# Altium PCB w47_LED_RGB_pinout.PcbDoc (part 1 of 2)
Units mm, origin at the board's own origin, x right, y up, seen from the top; angles counter-clockwise.
Board outline 167.64 x 288.93 mm, 2 copper layers (Top Layer, Bottom Layer); 100 components, 123 nets, 258 pads, 0 vias.
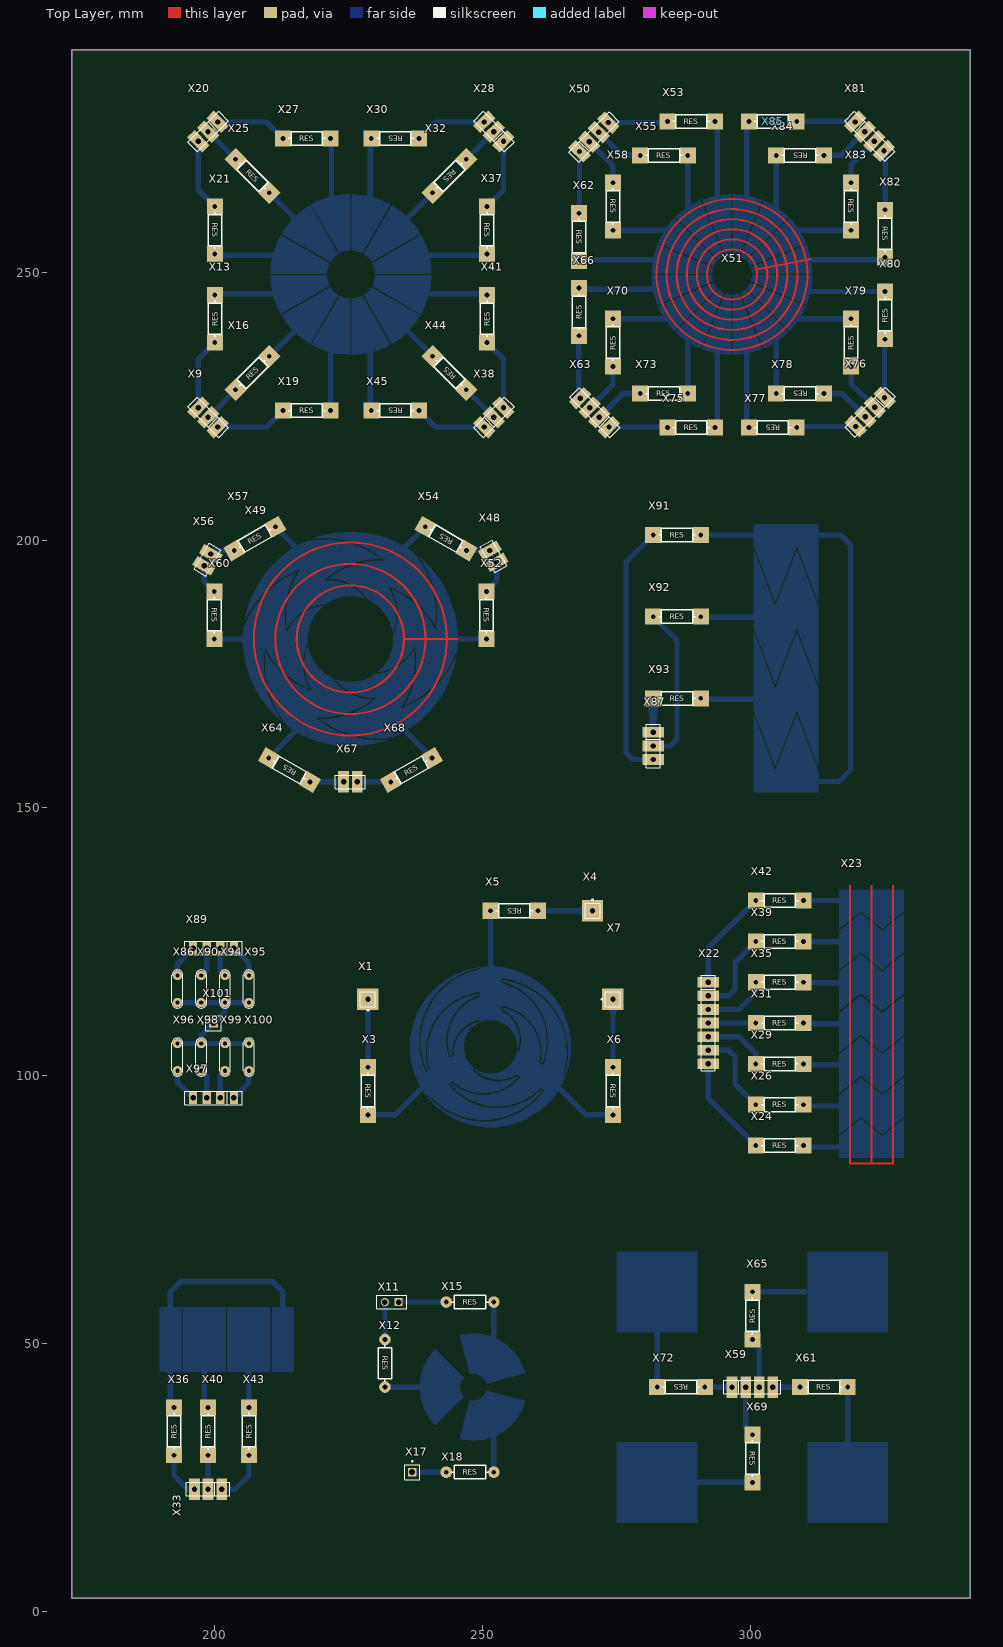
[diagram p0: Top Layer view]
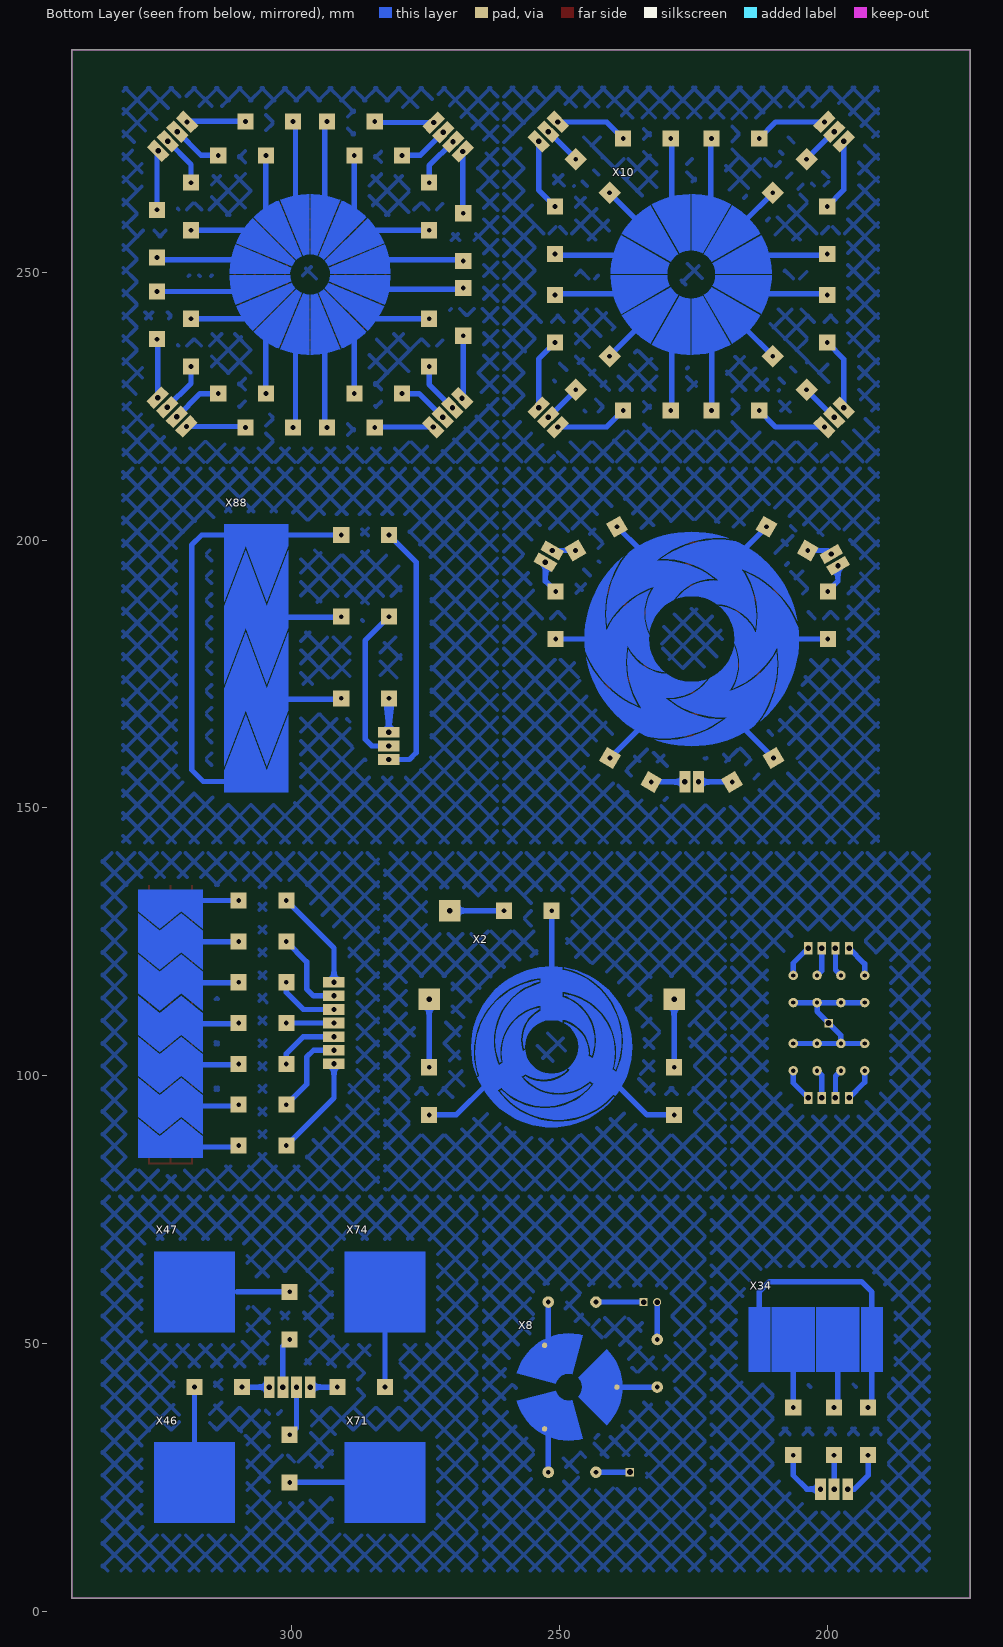
[diagram p1: Bottom Layer view, seen from below]

## Layer stack, top to bottom
Top Solder: solder mask 0.0102, Solder Resist, Dk 3.5
Top Layer: signal copper 0.0356
Dielectric 1: dielectric 0.32, FR-4, Dk 4.8
Bottom Layer: signal copper 0.0356
Bottom Solder: solder mask 0.0102, Solder Resist, Dk 3.5

## Board outline
173.355,2.54 173.355,146.05 173.355,291.465 340.995,291.465 340.995,146.05 340.995,2.54

## Design rules (kind name [scope] priority, off if disabled: settings)
Clearance [All] p1: gap=2 ignorepadtopadclearanceinfootprint=FALSE
PolygonConnect [All] p1: connectstyle=Relief reliefconductorwidth=0.254 reliefentries=4 polygonreliefangle="90 Angle" airgapwidth=0.254
RoutingVias [All] p1: holewidth=0.711 width=1.27 viastyle="Through Hole" minholewidth=0.711 minwidth=1.27 maxholewidth=0.711 maxwidth=1.27
SolderMaskExpansion [All] p1: expansion=0.102
Width [All] p1: maxlimit=2 minlimit=0.914 preferedwidth=1.5 toplayer_maxwidth=1.016 toplayer_prefwidth=0.914 bottomlayer_minwidth=1 minimp=50.000000 maximp=50.000000 favimp=50.000000
30 further rules are at their usual default settings.

## Components (designator, comment, footprint, x,y, rotation, side; value= is the part's Value field where it differs from the comment)
X1 "JP1" JP1-D1T#1 228.6,114.3 r180 top
X2 "Medium QTouch Wheel" ?#1 251.46,105.41 r180 bottom
X3 "RES" RES#1 228.6,97.155 r270 top
X4 "JP1" JP1-D1T#1 270.51,130.81 r0 top
X5 "RES" RES#1 255.905,130.81 r180 top
X6 "RES" RES#1 274.32,97.155 r270 top
X7 "JP1" JP1-D1T#1 274.32,114.3 r90 top
X8 "Small QTouch Wheel" ?#2 248.285,41.91 r270 bottom
X9 "JP3" JP3-C1T 200.551,221.089 r135 top
X10 "Medium Resistively Interpolated QTouch Wheel" ?#3 225.425,249.555 r345 bottom
X11 "JP2" JP2-C1T#1 234.315,57.785 r180 top
X12 "RES" RES#2 231.775,46.355 r270 top
X13 "RES" RES#1 200.025,241.3 r90 top
X15 "RES" RES#2 247.65,57.785 r0 top
X16 "RES" RES#1 207.042,231.172 r45 top
X17 "JP1" JP1-D1T#2 236.855,26.035 r0 top
X18 "RES" RES#2 247.65,26.035 r0 top
X19 "RES" RES#1 217.17,224.155 r0 top
X20 "JP3" JP3-C1T 200.551,278.021 r225 top
X21 "RES" RES#1 200.025,257.81 r270 top
X22 "JP7" JP7-D1T 292.1,117.475 r270 top
X23 "Medium QMatrix Slider" ?#4 322.58,109.715 r90 top
X24 "RES" RES#1 305.435,86.995 r0 top
X25 "RES" RES#1 207.042,267.938 r315 top
X26 "RES" RES#1 305.435,94.615 r0 top
X27 "RES" RES#1 217.17,274.955 r0 top
X28 "JP3" JP3-C1T 253.891,274.429 r135 top
X29 "RES" RES#1 305.435,102.235 r0 top
X30 "RES" RES#1 233.68,274.955 r180 top
X31 "RES" RES#1 305.435,109.855 r0 top
X32 "RES" RES#1 243.808,267.938 r225 top
X33 "JP3" JP3-C1T 201.295,22.86 r180 top
X34 "Small QTouch Slider" ?#5 202.208,50.8 r0 bottom
X35 "RES" RES#1 305.435,117.475 r0 top
X36 "RES" RES#1 192.405,33.655 r90 top
X37 "RES" RES#1 250.825,257.81 r270 top
X38 "JP3" JP3-C1T 250.299,221.089 r45 top
X39 "RES" RES#1 305.435,125.095 r0 top
X40 "RES" RES#1 198.755,33.655 r90 top
X41 "RES" RES#1 250.825,241.3 r90 top
X42 "RES" RES#1 305.435,132.715 r0 top
X43 "RES" RES#1 206.375,33.655 r90 top
X44 "RES" RES#1 243.808,231.172 r135 top
X45 "RES" RES#1 233.68,224.155 r180 top
X46 "QTouch Button" ?#6 318.135,24.13 r180 bottom
X47 "QTouch Button" ?#6 318.135,59.69 r180 bottom
X48 "JP2" JP2-C1T#2 251.359,198.038 r300 top
X49 "Medium & Large QMatrix Wheel" ?#7 225.324,181.528 r0 top
X50 "JP4" JP4-C1T#1 268.079,272.524 r45 top
X51 "Medium Resitively Interpolated QMatrix Wheel" ?#8 296.545,249.555 r11.25 top
X52 "RES" RES#1 250.724,185.973 r270 top
X53 "RES" RES#1 288.925,278.13 r0 top
X54 "RES" RES#1 243.143,200.26 r150 top
X55 "RES" RES#1 283.845,271.78 r0 top
X56 "JP2" JP2-C1T#2 198.019,195.203 r60 top
X57 "RES" RES#1 207.504,200.26 r30 top
X58 "RES" RES#1 274.32,262.255 r270 top
X59 "JP4" JP4-C1T#1 296.545,41.91 r0 top
X60 "RES" RES#1 199.924,185.973 r270 top
X61 "RES" RES#1 313.69,41.91 r0 top
X62 "RES" RES#1 267.97,256.54 r270 top
X63 "JP4" JP4-C1T#1 273.576,221.089 r135 top
X64 "RES" RES#1 213.933,157.08 r150 top
X65 "RES" RES#1 300.355,55.245 r90 top
X66 "RES" RES#1 267.97,242.57 r90 top
X67 "JP2" JP2-C1T#2 226.594,154.858 r180 top
X68 "RES" RES#1 236.714,157.08 r30 top
X69 "RES" RES#1 300.355,28.575 r270 top
X70 "RES" RES#1 274.32,236.855 r90 top
X71 "QTouch Button" ?#6 282.575,24.13 r180 bottom
X72 "RES" RES#1 287.02,41.91 r180 top
X73 "RES" RES#1 283.845,227.33 r0 top
X74 "QTouch Button" ?#6 282.575,59.69 r180 bottom
X75 "RES" RES#1 288.925,220.98 r0 top
X76 "JP4" JP4-C1T#1 325.011,226.586 r225 top
X77 "RES" RES#1 304.165,220.98 r180 top
X78 "RES" RES#1 309.245,227.33 r180 top
X79 "RES" RES#1 318.77,236.855 r90 top
X80 "RES" RES#1 325.12,241.935 r90 top
X81 "JP4" JP4-C1T#1 319.514,278.021 r315 top
X82 "RES" RES#1 325.12,257.175 r270 top
X83 "RES" RES#1 318.77,262.255 r270 top
X84 "RES" RES#1 309.245,271.78 r180 top
X85 "RES" RES#1 304.165,278.13 r180 top
X86 "Cap" CAP_2 193.04,116.205 r270 top
X87 "JP3" JP3-C1T 281.839,164.111 r270 top
X88 "Medium QTouch Slider" ?#9 306.604,177.941 r270 bottom
X89 "JP4" JP4-C1T#2 203.584,123.825 r180 top
X90 "Cap" CAP_2 197.485,116.205 r270 top
X91 "RES" RES#1 286.284,200.941 r0 top
X92 "RES" RES#1 286.284,185.701 r0 top
X93 "RES" RES#1 286.284,170.461 r0 top
X94 "Cap" CAP_2 201.93,116.205 r270 top
X95 "Cap" CAP_2 206.375,116.205 r270 top
X96 "Cap" CAP_2 193.04,103.505 r90 top
X97 "JP4" JP4-C1T#2 203.584,95.885 r180 top
X98 "Cap" CAP_2 197.485,103.505 r90 top
X99 "Cap" CAP_2 201.93,103.505 r90 top
X100 "Cap" CAP_2 206.375,103.505 r90 top
X101 "JP1" JP1-D1T#2 199.774,109.855 r90 top

## Footprints (in the part's own frame and the unit in brackets; to place one, negate y for a bottom-side part, rotate by r counter-clockwise, add the part's x,y. Pads: shape width x height; smd on the part's side, far side on the other; paste and mask are expansions set on the pad)
CAP_2 [mil]
  round 70 hole 31: 1(-100,0) 2(100,0)
  silkscreen extent -140,-40 140,40, body extent -163,-80 163,79, height 363
JP1-D1T#1 [mm] "1pins, 1 row, straight, gold plating"
  rect 4x4 hole 1 mask+0.102: 1(0,0)
  silkscreen extent -1.4,-1.4 1.4,2.17, body extent -1.27,-1.27 1.27,1.27, height 8.54
JP1-D1T#2 [mm] "1pins, 1 row, straight, gold plating"
  rect 1.6x1.6 hole 1.1: 1(0,0)
  silkscreen extent -1.4,-1.4 1.4,2.17, body extent -1.27,-1.27 1.27,1.27, height 8.54
JP2-C1T#1 [mm] "2 row, straight, gold plating"
  rect 1.52x1.52 hole 1.02: 1(0,0)
  round 1.52 hole 1.02: 2(2.54,0)
  silkscreen extent -1.52,-1.27 4.06,1.27, body extent -1.52,-1.25 4.06,1.25, height 8.51
JP2-C1T#2 [mm] "2 row, straight, gold plating"
  rect 2x4 hole 1 mask+0.102: 1(0,0) 2(2.54,0)
  silkscreen extent -1.52,-1.27 4.06,1.27, body extent -1.52,-1.25 4.06,1.25, height 8.51
JP3-C1T [mm] "3 row, straight, gold plating"
  rect 2x4 hole 1 mask+0.102: 1(0,0) 2(2.54,0) 3(5.08,0)
  silkscreen extent -1.52,-1.27 6.6,1.27, body extent -1.52,-1.25 6.6,1.25, height 8.51
JP4-C1T#1 [mm] "4 row, straight, gold plating"
  rect 2x4 hole 1 mask+0.102: 1(0,0) 2(2.54,0) 3(5.08,0) 4(7.62,0)
  silkscreen extent -1.52,-1.27 9.14,1.27, body extent -1.52,-1.25 9.14,1.25, height 8.51
JP4-C1T#2 [mm] "4 row, straight, gold plating"
  rect 1.524x2.286 hole 1.02: 1(0,0) 2(2.54,0) 3(5.08,0) 4(7.62,0)
  silkscreen extent -1.52,-1.27 9.14,1.27, body extent -1.52,-1.25 9.14,1.25, height 8.51
JP7-D1T [mm] "7 pins, 1 row, straight, gold plating"
  rect 2x4 hole 1 mask+0.102: 1(0,0) 2(2.54,0) 3(5.08,0) 4(7.62,0) 5(10.16,0) 6(12.7,0) 7(15.24,0)
  silkscreen extent -1.27,-1.27 16.51,1.27, body extent -1.27,-1.27 16.51,1.27, height 8.54
RES#1 [mm]
  rect 3x3 hole 0.889: 1(-4.445,0) 2(4.445,0)
  silkscreen extent -3.43,-1.27 3.43,1.27, body extent -5.35,-1.2 5.45,1.2, height 2.83
RES#2 [mm]
  round 2.159 hole 0.889: 1(-4.445,0) 2(4.445,0)
  silkscreen extent -3.43,-1.27 3.43,1.27, body extent -5.35,-1.2 5.45,1.2, height 2.83
?#1 [mm]
  rect 0x4 all layers, no hole paste-0.5 mask+0.102: 1(12.124,-7) 2(0,14) 3(-12.124,-7)
  Top Layer region: 217 vertices and 0 holes, not listed, extent -9.625,-13.618 15.012,14.832
  Top Layer region: 217 vertices and 0 holes, not listed, extent -15.012,-5.42 13.005,15.012
  Top Layer region: 220 vertices and 0 holes, not listed, extent -14.229,-15.012 11.687,12.439
?#2 [mm]
  round 1 smd paste-0.5: 1(0,9) 2(-7.794,-4.5) 3(7.794,-4.5)
  Top Layer region: 2.588,-9.659 2.589,-9.661 2.906,-9.581 3.831,-9.25 4.72,-8.83 5.562,-8.325 6.352,-7.739 7.08,-7.08 7.739,-6.352 8.325,-5.562 8.83,-4.72 9.25,-3.831 9.581,-2.906 9.82,-1.953 9.964,-0.981 10.012,0 9.964,0.981 9.82,1.953 9.661,2.589 2.415,0.647 2.416,0.647 2.464,0.49 2.512,0 2.464,-0.49 2.321,-0.961 2.089,-1.396 1.776,-1.776 1.396,-2.089 0.961,-2.321 0.647,-2.416
  Top Layer region: -9.659,2.588 -9.661,2.589 -9.82,1.953 -9.964,0.981 -10.012,0 -9.964,-0.981 -9.82,-1.953 -9.581,-2.906 -9.25,-3.831 -8.83,-4.72 -8.325,-5.562 -7.739,-6.352 -7.08,-7.08 -6.352,-7.739 -5.562,-8.325 -4.72,-8.83 -3.831,-9.25 -2.906,-9.581 -2.589,-9.661 -0.647,-2.415 -0.647,-2.416 -0.961,-2.321 -1.396,-2.089 -1.776,-1.776 -2.089,-1.396 -2.321,-0.961 -2.464,-0.49 -2.512,0 -2.464,0.49 -2.416,0.647
  Top Layer region: 7.08,7.08 7.08,7.08 6.352,7.739 5.562,8.325 4.72,8.83 3.831,9.25 2.906,9.581 1.953,9.82 0.981,9.964 0,10.012 -0.981,9.964 -1.953,9.82 -2.906,9.581 -3.831,9.25 -4.72,8.83 -5.562,8.325 -6.352,7.739 -7.08,7.08 -7.08,7.08 -1.776,1.776 -1.776,1.776 -1.396,2.089 -0.961,2.321 -0.49,2.464 0,2.512 0.49,2.464 0.961,2.321 1.396,2.089 1.776,1.776 1.776,1.776
?#3 [mm]
  rect 0x0 all layers, no hole paste-0.5 mask+0.102: 1(0,14) 2(-7,12.124) 3(-12.124,7) 4(-14,0) 5(-12.124,-7) 6(-7,-12.124) 7(0,-14) 8(7,-12.124) 9(12.124,-7) 10(14,0) 11(12.124,7) 12(7,12.124)
  Top Layer region: 3.737,14.527 3.738,14.531 3.504,14.597 2.348,14.827 1.178,14.965 0,15.012 -1.178,14.965 -2.348,14.827 -3.504,14.597 -3.738,14.531 -1.019,4.383 -1.02,4.385 -0.589,4.471 0,4.51 0.589,4.471 1.02,4.385
  Top Layer region: -4.027,14.449 -4.027,14.449 -4.639,14.277 -5.745,13.869 -6.815,13.375 -7.844,12.799 -8.824,12.145 -9.749,11.415 -10.504,10.717 -3.074,3.286 -3.076,3.288 -2.745,3.578 -2.255,3.905 -1.726,4.166 -1.31,4.308
  Top Layer region: -10.712,10.5 -10.717,10.504 -11.415,9.749 -12.145,8.824 -12.799,7.844 -13.375,6.815 -13.869,5.745 -14.277,4.639 -14.449,4.027 -4.305,1.309 -4.308,1.31 -4.166,1.726 -3.905,2.255 -3.578,2.745 -3.288,3.076
  Top Layer region: -14.527,3.737 -14.531,3.738 -14.597,3.504 -14.827,2.348 -14.965,1.178 -15.012,0 -14.965,-1.178 -14.827,-2.348 -14.597,-3.504 -14.531,-3.738 -4.383,-1.019 -4.385,-1.02 -4.471,-0.589 -4.51,0 -4.471,0.589 -4.385,1.02
  Top Layer region: -14.449,-4.027 -14.449,-4.027 -14.277,-4.639 -13.869,-5.745 -13.375,-6.815 -12.799,-7.844 -12.145,-8.824 -11.415,-9.749 -10.717,-10.504 -3.286,-3.074 -3.288,-3.076 -3.578,-2.745 -3.905,-2.255 -4.166,-1.726 -4.308,-1.31
  Top Layer region: -10.5,-10.712 -10.504,-10.717 -9.749,-11.415 -8.824,-12.145 -7.844,-12.799 -6.815,-13.375 -5.745,-13.869 -4.639,-14.277 -4.027,-14.449 -1.309,-4.305 -1.31,-4.308 -1.726,-4.166 -2.255,-3.905 -2.745,-3.578 -3.076,-3.288
  Top Layer region: -3.737,-14.527 -3.738,-14.531 -3.504,-14.597 -2.348,-14.827 -1.178,-14.965 0,-15.012 1.178,-14.965 2.348,-14.827 3.504,-14.597 3.738,-14.531 1.019,-4.383 1.02,-4.385 0.589,-4.471 0,-4.51 -0.589,-4.471 -1.02,-4.385
  Top Layer region: 4.027,-14.449 4.027,-14.449 4.639,-14.277 5.745,-13.869 6.815,-13.375 7.844,-12.799 8.824,-12.145 9.749,-11.415 10.504,-10.717 3.074,-3.286 3.076,-3.288 2.745,-3.578 2.255,-3.905 1.726,-4.166 1.31,-4.308
  Top Layer region: 10.712,-10.5 10.717,-10.504 11.415,-9.749 12.145,-8.824 12.799,-7.844 13.375,-6.815 13.869,-5.745 14.277,-4.639 14.449,-4.027 4.305,-1.309 4.308,-1.31 4.166,-1.726 3.905,-2.255 3.578,-2.745 3.288,-3.076
  Top Layer region: 14.527,-3.737 14.531,-3.738 14.597,-3.504 14.827,-2.348 14.965,-1.178 15.012,0 14.965,1.178 14.827,2.348 14.597,3.504 14.531,3.738 4.383,1.019 4.385,1.02 4.471,0.589 4.51,0 4.471,-0.589 4.385,-1.02
  Top Layer region: 14.449,4.027 14.449,4.027 14.277,4.639 13.869,5.745 13.375,6.815 12.799,7.844 12.145,8.824 11.415,9.749 10.717,10.505 3.286,3.074 3.288,3.076 3.578,2.745 3.905,2.255 4.166,1.726 4.308,1.31
  Top Layer region: 10.5,10.712 10.504,10.717 9.749,11.415 8.824,12.145 7.844,12.799 6.815,13.375 5.745,13.869 4.639,14.277 4.027,14.449 1.309,4.305 1.31,4.308 1.726,4.166 2.255,3.905 2.745,3.578 3.076,3.288
?#4 [mm]
  rect 0x0 all layers, no hole paste-0.05 mask+0.102: 1(-23,0) 2(-15.333,0) 3(-7.667,0) 4(0,0) 5(7.667,0) 6(15.333,0) 7(23,0)
  rect 0x0 all layers, no hole paste-0.135 mask+0.102: Y(-26.05,0)
  Top Layer region: -26.2,4.15 -25.9,4.15 -25.9,-4.15 -26.2,-4.15
  Top Layer region: -25.9,-3.85 25.9,-3.85 25.9,-4.15 -25.9,-4.15
  Top Layer region: -25.9,0.15 25.9,0.15 25.9,-0.15 -25.9,-0.15
  Top Layer region: -25.9,4.15 25.9,4.15 25.9,3.85 -25.9,3.85
  Bottom Layer region: 17.721,6 25,6 25,-6 21,-6 17.721,-2 21,2
  Bottom Layer region: 10.055,6 17.333,6 20.612,2 17.333,-2 20.612,-6 13.333,-6 10.055,-2 13.333,2
  Bottom Layer region: 2.388,6 9.667,6 12.945,2 9.667,-2 12.945,-6 5.667,-6 2.388,-2 5.667,2
  Bottom Layer region: -5.279,6 2,6 5.279,2 2,-2 5.279,-6 -2,-6 -5.279,-2 -2,2
  Bottom Layer region: -12.945,6 -5.667,6 -2.388,2 -5.667,-2 -2.388,-6 -9.667,-6 -12.945,-2 -9.667,2
  Bottom Layer region: -20.612,6 -13.333,6 -10.055,2 -13.333,-2 -10.055,-6 -17.333,-6 -20.612,-2 -17.333,2
  Bottom Layer region: -25,6 -21,6 -17.721,2 -21,-2 -17.721,-6 -25,-6
?#5 [mm]
  rect 0x0 all layers, no hole paste-0.05 mask+0.102: 1(-10.492,0) 1(10.492,0) 2(-4.167,0) 3(4.167,0)
  Top Layer region: -12.5,6 -8.483,6 -8.483,-6 -12.5,-6
  Top Layer region: -8.183,6 -0.15,6 -0.15,-6 -8.183,-6
  Top Layer region: 0.15,6 8.183,6 8.183,-6 0.15,-6
  Top Layer region: 8.483,6 12.5,6 12.5,-6 8.483,-6
?#6 [mm]
  rect 0x0 all layers, no hole paste-0.05 mask+0.102: 1(0,0)
  Top Layer region: -7.5,-7.5 -7.5,7.5 7.5,7.5 7.5,-7.5
?#7 [mm]
  rect 0x0 all layers, no hole paste-0.5 mask+0.102: 1(19,0) 2(9.5,16.455) 3(-9.5,16.455) 4(-19,0) 5(-9.5,-16.455) 6(9.5,-16.455)
  rect 0x0 all layers, no hole paste-0.15 mask+0.102: Y(19.85,0)
  Top Layer region: 10,0.15 20,0.15 20,-0.15 10,-0.15
  Top Layer region: 10.162,0 10.113,0.996 9.967,1.983 9.725,2.95 9.389,3.889 8.962,4.79 8.45,5.646 7.856,6.447 7.186,7.186 6.447,7.856 5.646,8.45 4.79,8.962 3.889,9.389 2.95,9.725 1.983,9.967 0.996,10.113 0,10.162 -0.996,10.113 -1.983,9.967 -2.95,9.725 -3.889,9.389 -4.79,8.962 -5.646,8.45 -6.447,7.856 -7.186,7.186 -7.856,6.447 -8.45,5.646 -8.962,4.79 -9.389,3.889 -9.725,2.95 -9.967,1.983 -10.113,0.996 -10.162,0 -10.113,-0.996 -9.967,-1.983 -9.725,-2.95 -9.389,-3.889 -8.962,-4.79 -8.45,-5.646 -7.856,-6.447 -7.186,-7.186 -6.447,-7.856 -5.646,-8.45 -4.79,-8.962 -3.889,-9.389 -2.95,-9.725 -1.983,-9.967 -0.996,-10.113 0,-10.162 0.996,-10.113 1.983,-9.967 2.95,-9.725 3.889,-9.389 4.79,-8.962 5.646,-8.45 6.447,-7.856 7.186,-7.186 7.856,-6.447 8.45,-5.646 8.962,-4.79 9.389,-3.889 9.725,-2.95 9.967,-1.983 10.113,-0.996 10.162,0 9.862,0 9.814,-0.967 9.672,-1.924 9.437,-2.863 9.111,-3.774 8.697,-4.649 8.2,-5.479 7.623,-6.256 6.973,-6.973 6.256,-7.623 5.479,-8.2 4.649,-8.697 3.774,-9.111 2.863,-9.437 1.924,-9.672 0.967,-9.814 0,-9.862 -0.967,-9.814 -1.924,-9.672 -2.863,-9.437 -3.774,-9.111 -4.649,-8.697 -5.479,-8.2 -6.256,-7.623 -6.973,-6.973 -7.623,-6.256 -8.2,-5.479 -8.697,-4.649 -9.111,-3.774 -9.437,-2.863 -9.672,-1.924 -9.814,-0.967 -9.862,0 -9.814,0.967 -9.672,1.924 -9.437,2.863 -9.111,3.774 -8.697,4.649 -8.2,5.479 -7.623,6.256 -6.973,6.973 -6.256,7.623 -5.479,8.2 -4.649,8.697 -3.774,9.111 -2.863,9.437 -1.924,9.672 -0.967,9.814 0,9.862 0.967,9.814 1.924,9.672 2.863,9.437 3.774,9.111 4.649,8.697 5.479,8.2 6.256,7.623 6.973,6.973 7.623,6.256 8.2,5.479 8.697,4.649 9.111,3.774 9.437,2.863 9.672,1.924 9.814,0.967 9.862,0
  Top Layer region: 163 vertices and 0 holes, not listed, extent -14.161,-14.161 14.161,14.161
  Top Layer region: 179 vertices and 0 holes, not listed, extent -18.162,-18.162 18.162,18.162
  Bottom Layer region: 19.707,-3.414 19.717,-3.419 19.138,-4.574 18.468,-5.703 17.719,-6.781 16.896,-7.804 16.001,-8.764 15.041,-9.659 14.018,-10.483 12.94,-11.231 11.811,-11.901 10.637,-12.489 9.424,-12.991 9.288,-13.036 9.286,-13.03 9.706,-12.401 10.303,-11.336 10.814,-10.228 11.237,-9.082 11.568,-7.907 11.806,-6.71 11.95,-5.498 11.998,-4.278 11.95,-3.058 11.83,-2.045 11.825,-2.046 11.544,-2.515 11.013,-3.231 10.414,-3.891 9.754,-4.49 9.038,-5.021 8.273,-5.479 7.467,-5.86 6.628,-6.161 5.764,-6.377 4.882,-6.508 4.639,-6.52 4.639,-6.518 4.263,-6.784 3.477,-7.219 2.646,-7.563 1.783,-7.812 0.897,-7.962 0,-8.013 -0.897,-7.962 -1.783,-7.812 -2.646,-7.563 -2.831,-7.487 -2.83,-7.483 -2.634,-7.748 -2.055,-8.386 -1.416,-8.965 -0.724,-9.479 0.015,-9.922 0.794,-10.29 1.606,-10.581 2.442,-10.79 3.294,-10.917 4.155,-10.959 5.004,-10.917 5.005,-10.909 4.735,-11.158 3.758,-11.928 2.723,-12.62 1.637,-13.228 0.507,-13.749 -0.66,-14.179 -1.858,-14.517 -3.078,-14.76 -4.314,-14.906 -5.557,-14.955 -5.722,-14.949 -5.727,-14.95 -4.714,-15.654 -3.603,-16.312 -2.448,-16.89 -1.255,-17.385 -0.03,-17.792 1.221,-18.112 2.492,-18.341 3.776,-18.479 5.066,-18.525 6.357,-18.479 7.641,-18.341 8.206,-18.239 8.206,-18.239 8.851,-17.947 10.005,-17.33 11.117,-16.638 12.182,-15.875 13.194,-15.045 14.15,-14.15 15.045,-13.194 15.876,-12.182 16.638,-11.117 17.33,-10.005 17.947,-8.85 18.488,-7.658 18.949,-6.432 19.329,-5.179 19.626,-3.904 19.707,-3.414
  Bottom Layer region: 6.897,-18.773 6.897,-18.775 6.482,-18.819 5.17,-18.866 3.858,-18.819 2.553,-18.679 1.261,-18.446 -0.011,-18.121 -1.257,-17.707 -2.469,-17.204 -3.643,-16.617 -4.772,-15.947 -5.85,-15.198 -6.643,-14.559 -6.642,-14.566 -5.48,-14.612 -4.26,-14.564 -3.048,-14.421 -1.85,-14.182 -0.675,-13.851 0.47,-13.429 1.579,-12.917 2.644,-12.321 3.659,-11.643 4.141,-11.263 4.141,-11.272 3.298,-11.23 2.416,-11.1 1.551,-10.883 0.712,-10.583 -0.094,-10.202 -0.858,-9.743 -1.574,-9.212 -2.235,-8.614 -2.833,-7.953 -3.332,-7.281 -3.327,-7.281 -3.477,-7.219 -4.263,-6.784 -4.996,-6.265 -5.666,-5.666 -6.265,-4.996 -6.784,-4.263 -7.219,-3.477 -7.563,-2.646 -7.812,-1.783 -7.895,-1.291 -7.903,-1.288 -7.921,-1.326 -8.211,-2.137 -8.421,-2.973 -8.547,-3.826 -8.59,-4.687 -8.547,-5.548 -8.421,-6.4 -8.211,-7.236 -7.921,-8.048 -7.553,-8.827 -7.11,-9.566 -6.945,-9.787 -6.947,-9.796 -8.07,-9.382 -9.2,-8.861 -10.286,-8.253 -11.321,-7.562 -12.298,-6.792 -13.212,-5.947 -14.056,-5.033 -14.827,-4.056 -15.518,-3.021 -15.801,-2.516 -15.802,-2.516 -15.888,-3.315 -15.934,-4.605 -15.888,-5.896 -15.749,-7.18 -15.52,-8.451 -15.201,-9.702 -14.793,-10.927 -14.299,-12.12 -13.721,-13.275 -13.062,-14.385 -12.326,-15.446 -11.695,-16.229 -11.692,-16.226 -11.117,-16.638 -10.005,-17.33 -8.85,-17.947 -7.658,-18.487 -6.432,-18.949 -5.179,-19.329 -3.904,-19.626 -2.612,-19.84 -1.309,-19.968 0,-20.011 1.309,-19.968 2.612,-19.84 3.904,-19.626 5.179,-19.329 6.432,-18.949 6.897,-18.774
  Bottom Layer region: -12.81,-15.359 -12.811,-15.36 -13.298,-14.658 -13.968,-13.529 -14.556,-12.355 -15.058,-11.142 -15.473,-9.897 -15.797,-8.625 -16.03,-7.333 -16.171,-6.028 -16.217,-4.716 -16.171,-3.404 -16.03,-2.099 -15.927,-1.527 -15.929,-1.528 -15.783,-1.845 -15.186,-2.91 -14.508,-3.925 -13.752,-4.884 -12.923,-5.78 -12.027,-6.609 -11.068,-7.365 -10.053,-8.043 -8.988,-8.64 -7.879,-9.151 -7.686,-9.222 -7.686,-9.218 -7.814,-9.004 -8.195,-8.198 -8.495,-7.359 -8.712,-6.494 -8.843,-5.613 -8.887,-4.722 -8.843,-3.832 -8.712,-2.95 -8.495,-2.086 -8.195,-1.246 -7.964,-0.759 -7.97,-0.759 -8.013,0 -7.962,0.897 -7.812,1.783 -7.563,2.646 -7.219,3.477 -6.784,4.263 -6.265,4.996 -5.666,5.666 -5.07,6.198 -5.066,6.194 -5.676,6.103 -6.512,5.894 -7.323,5.604 -8.102,5.235 -8.842,4.792 -9.534,4.279 -10.173,3.7 -10.751,3.061 -11.265,2.369 -11.708,1.63 -11.949,1.121 -11.948,1.12 -12.101,1.887 -12.247,3.123 -12.296,4.366 -12.247,5.61 -12.101,6.846 -11.858,8.066 -11.52,9.264 -11.09,10.431 -10.569,11.561 -10.083,12.428 -10.08,12.428 -10.425,12.285 -11.58,11.707 -12.69,11.048 -13.751,10.312 -14.757,9.501 -15.702,8.621 -16.582,7.676 -17.392,6.671 -18.128,5.61 -18.787,4.5 -19.365,3.345 -19.859,2.152 -19.905,2.015 -19.899,2.013 -19.968,1.309 -20.011,0 -19.968,-1.309 -19.84,-2.612 -19.626,-3.904 -19.329,-5.179 -18.949,-6.432 -18.487,-7.658 -17.947,-8.85 -17.33,-10.005 -16.638,-11.117 -15.876,-12.182 -15.045,-13.194 -14.15,-14.15 -13.194,-15.045 -12.81,-15.36
  Bottom Layer region: -19.707,3.414 -19.717,3.419 -19.138,4.574 -18.468,5.703 -17.719,6.781 -16.896,7.804 -16.001,8.764 -15.04,9.659 -14.018,10.483 -12.94,11.231 -11.811,11.901 -10.637,12.489 -9.424,12.991 -9.288,13.036 -9.286,13.03 -9.706,12.401 -10.303,11.336 -10.814,10.228 -11.237,9.082 -11.568,7.907 -11.806,6.71 -11.95,5.498 -11.998,4.278 -11.95,3.058 -11.83,2.045 -11.825,2.046 -11.544,2.515 -11.013,3.231 -10.414,3.891 -9.754,4.49 -9.038,5.021 -8.273,5.479 -7.467,5.86 -6.628,6.161 -5.764,6.377 -4.882,6.508 -4.639,6.52 -4.639,6.518 -4.263,6.784 -3.477,7.219 -2.646,7.563 -1.783,7.812 -0.897,7.962 0,8.013 0.897,7.962 1.783,7.812 2.646,7.563 2.831,7.487 2.83,7.483 2.634,7.748 2.055,8.386 1.416,8.965 0.724,9.479 -0.015,9.922 -0.794,10.29 -1.606,10.581 -2.442,10.79 -3.294,10.917 -4.155,10.959 -5.004,10.917 -5.005,10.909 -4.735,11.158 -3.758,11.928 -2.723,12.62 -1.637,13.228 -0.507,13.749 0.66,14.179 1.858,14.517 3.078,14.76 4.314,14.906 5.557,14.955 5.722,14.949 5.727,14.95 4.714,15.654 3.603,16.312 2.448,16.89 1.255,17.385 0.03,17.792 -1.221,18.112 -2.492,18.341 -3.776,18.479 -5.066,18.525 -6.357,18.479 -7.641,18.341 -8.206,18.239 -8.206,18.239 -8.851,17.947 -10.005,17.33 -11.117,16.638 -12.182,15.876 -13.194,15.045 -14.15,14.15 -15.045,13.194 -15.876,12.182 -16.638,11.117 -17.33,10.005 -17.947,8.85 -18.488,7.658 -18.949,6.432 -19.329,5.179 -19.626,3.904 -19.707,3.414
  Bottom Layer region: -6.897,18.773 -6.897,18.775 -6.482,18.819 -5.17,18.866 -3.858,18.819 -2.553,18.679 -1.261,18.446 0.011,18.121 1.257,17.707 2.469,17.204 3.643,16.617 4.772,15.947 5.85,15.198 6.643,14.559 6.642,14.566 5.48,14.612 4.26,14.564 3.048,14.421 1.85,14.182 0.675,13.851 -0.47,13.429 -1.579,12.917 -2.644,12.321 -3.659,11.643 -4.141,11.263 -4.141,11.272 -3.298,11.23 -2.416,11.1 -1.551,10.883 -0.712,10.583 0.094,10.202 0.858,9.743 1.574,9.212 2.235,8.614 2.833,7.953 3.332,7.281 3.327,7.281 3.477,7.219 4.263,6.784 4.996,6.265 5.666,5.666 6.265,4.996 6.784,4.263 7.219,3.477 7.563,2.646 7.812,1.783 7.895,1.291 7.903,1.288 7.921,1.326 8.211,2.137 8.421,2.973 8.547,3.826 8.59,4.687 8.547,5.548 8.421,6.4 8.211,7.236 7.921,8.048 7.553,8.827 7.11,9.566 6.945,9.787 6.947,9.796 8.07,9.382 9.2,8.861 10.286,8.253 11.321,7.562 12.298,6.792 13.212,5.947 14.056,5.033 14.827,4.056 15.518,3.021 15.801,2.516 15.802,2.516 15.888,3.315 15.934,4.606 15.888,5.896 15.749,7.18 15.52,8.451 15.201,9.702 14.793,10.927 14.299,12.12 13.721,13.275 13.062,14.385 12.326,15.446 11.695,16.229 11.692,16.226 11.117,16.638 10.005,17.33 8.85,17.947 7.658,18.487 6.432,18.949 5.179,19.329 3.904,19.626 2.612,19.84 1.309,19.968 0,20.011 -1.309,19.968 -2.612,19.84 -3.904,19.626 -5.179,19.329 -6.432,18.949 -6.897,18.774
  Bottom Layer region: 12.81,15.359 12.811,15.36 13.298,14.658 13.968,13.529 14.556,12.355 15.058,11.142 15.473,9.897 15.797,8.625 16.03,7.333 16.171,6.028 16.217,4.716 16.171,3.404 16.03,2.099 15.927,1.527 15.929,1.528 15.783,1.845 15.186,2.91 14.508,3.925 13.752,4.884 12.924,5.78 12.027,6.609 11.068,7.365 10.053,8.043 8.988,8.64 7.879,9.151 7.686,9.222 7.686,9.218 7.814,9.004 8.195,8.198 8.495,7.359 8.712,6.494 8.843,5.613 8.887,4.722 8.843,3.832 8.712,2.95 8.495,2.086 8.195,1.246 7.964,0.759 7.97,0.759 8.013,0 7.962,-0.897 7.812,-1.783 7.563,-2.646 7.219,-3.477 6.784,-4.263 6.265,-4.996 5.666,-5.666 5.07,-6.198 5.066,-6.194 5.676,-6.103 6.512,-5.894 7.323,-5.604 8.102,-5.235 8.842,-4.792 9.534,-4.279 10.173,-3.7 10.751,-3.061 11.265,-2.369 11.708,-1.63 11.949,-1.121 11.948,-1.12 12.101,-1.887 12.247,-3.123 12.296,-4.366 12.247,-5.61 12.101,-6.846 11.858,-8.066 11.52,-9.264 11.09,-10.431 10.569,-11.561 10.083,-12.428 10.08,-12.428 10.425,-12.285 11.58,-11.707 12.69,-11.048 13.751,-10.312 14.757,-9.501 15.702,-8.621 16.582,-7.676 17.392,-6.671 18.128,-5.61 18.787,-4.5 19.365,-3.345 19.859,-2.152 19.905,-2.015 19.899,-2.012 19.968,-1.309 20.011,0 19.968,1.309 19.84,2.612 19.626,3.904 19.329,5.179 18.949,6.432 18.487,7.658 17.947,8.85 17.33,10.005 16.638,11.117 15.876,12.182 15.045,13.194 14.15,14.15 13.194,15.045 12.81,15.36
?#8 [mm]
  rect 0x0 all layers, no hole paste-0.5 mask+0.102: 1(0,14) 2(-5.358,12.934) 3(-9.899,9.899) 4(-12.934,5.358) 5(-14,0) 6(-12.934,-5.358) 7(-9.899,-9.899) 8(-5.358,-12.934) 9(0,-14) 10(5.358,-12.934) 11(9.899,-9.899) 12(12.934,-5.358) 13(14,0) 14(12.934,5.358) 15(9.899,9.899) 16(5.358,12.934)
  rect 0x0 all layers, no hole paste-0.15 mask+0.102: Y(14.85,0)
  Top Layer region: 163 vertices and 0 holes, not listed, extent -14.223,-14.223 14.223,14.223
  Top Layer region: 12.349,0 12.302,1.076 12.162,2.144 11.928,3.196 11.605,4.224 11.192,5.219 10.695,6.175 10.116,7.083 9.46,7.938 8.732,8.732 7.938,9.46 7.083,10.116 6.175,10.695 5.219,11.192 4.224,11.604 3.196,11.928 2.144,12.162 1.076,12.302 0,12.349 -1.076,12.302 -2.144,12.162 -3.196,11.928 -4.224,11.604 -5.219,11.192 -6.175,10.695 -7.083,10.116 -7.938,9.46 -8.732,8.732 -9.46,7.938 -10.116,7.083 -10.695,6.175 -11.192,5.219 -11.605,4.224 -11.928,3.196 -12.162,2.144 -12.302,1.076 -12.349,0 -12.302,-1.076 -12.162,-2.144 -11.928,-3.196 -11.605,-4.224 -11.192,-5.219 -10.695,-6.175 -10.116,-7.083 -9.46,-7.938 -8.732,-8.732 -7.938,-9.46 -7.083,-10.116 -6.175,-10.695 -5.219,-11.192 -4.224,-11.604 -3.196,-11.928 -2.144,-12.162 -1.076,-12.302 0,-12.349 1.076,-12.302 2.144,-12.162 3.196,-11.928 4.224,-11.604 5.219,-11.192 6.175,-10.695 7.083,-10.116 7.938,-9.46 8.732,-8.732 9.46,-7.938 10.116,-7.083 10.695,-6.175 11.192,-5.219 11.605,-4.224 11.928,-3.196 12.162,-2.144 12.302,-1.076 12.349,0 12.049,0 12.003,-1.05 11.866,-2.092 11.638,-3.118 11.322,-4.121 10.92,-5.092 10.435,-6.024 9.87,-6.911 9.23,-7.745 8.52,-8.52 7.745,-9.23 6.911,-9.87 6.024,-10.435 5.092,-10.92 4.121,-11.322 3.119,-11.638 2.092,-11.866 1.05,-12.003 0,-12.049 -1.05,-12.003 -2.092,-11.866 -3.118,-11.638 -4.121,-11.322 -5.092,-10.92 -6.024,-10.435 -6.911,-9.87 -7.745,-9.23 -8.52,-8.52 -9.23,-7.745 -9.87,-6.911 -10.435,-6.024 -10.92,-5.092 -11.322,-4.121 -11.638,-3.118 -11.866,-2.092 -12.003,-1.05 -12.049,0 -12.003,1.05 -11.866,2.092 -11.638,3.118 -11.322,4.121 -10.92,5.092 -10.435,6.024 -9.87,6.911 -9.23,7.745 -8.52,8.52 -7.745,9.23 -6.911,9.87 -6.024,10.435 -5.092,10.92 -4.121,11.322 -3.119,11.638 -2.092,11.866 -1.05,12.003 0,12.049 1.05,12.003 2.092,11.866 3.118,11.638 4.121,11.322 5.092,10.92 6.024,10.435 6.911,9.87 7.745,9.23 8.52,8.52 9.23,7.745 9.87,6.911 10.435,6.024 10.92,5.092 11.322,4.121 11.638,3.118 11.866,2.092 12.003,1.05 12.049,0
  Top Layer region: 10.475,0 10.425,1.027 10.274,2.044 10.024,3.041 9.678,4.009 9.238,4.938 8.71,5.82 8.097,6.645 7.407,7.407 6.645,8.097 5.82,8.71 4.938,9.238 4.009,9.678 3.041,10.024 2.044,10.274 1.027,10.425 0,10.475 -1.027,10.425 -2.044,10.274 -3.041,10.024 -4.009,9.678 -4.938,9.238 -5.82,8.71 -6.645,8.097 -7.407,7.407 -8.097,6.645 -8.71,5.82 -9.238,4.938 -9.678,4.009 -10.024,3.041 -10.274,2.044 -10.425,1.027 -10.475,0 -10.425,-1.027 -10.274,-2.044 -10.024,-3.041 -9.678,-4.009 -9.238,-4.938 -8.71,-5.82 -8.097,-6.645 -7.407,-7.407 -6.645,-8.097 -5.82,-8.71 -4.938,-9.238 -4.009,-9.678 -3.041,-10.024 -2.044,-10.274 -1.027,-10.425 0,-10.475 1.027,-10.425 2.044,-10.274 3.041,-10.024 4.009,-9.678 4.938,-9.238 5.82,-8.71 6.645,-8.097 7.407,-7.407 8.097,-6.645 8.71,-5.82 9.238,-4.938 9.678,-4.009 10.024,-3.041 10.274,-2.044 10.425,-1.027 10.475,0 10.175,0 10.126,-0.997 9.979,-1.985 9.737,-2.954 9.4,-3.894 8.973,-4.796 8.46,-5.653 7.865,-6.455 7.195,-7.195 6.455,-7.865 5.653,-8.46 4.796,-8.973 3.894,-9.4 2.954,-9.737 1.985,-9.979 0.997,-10.126 0,-10.175 -0.997,-10.126 -1.985,-9.979 -2.954,-9.737 -3.894,-9.4 -4.796,-8.973 -5.653,-8.46 -6.455,-7.865 -7.195,-7.195 -7.865,-6.455 -8.46,-5.653 -8.973,-4.796 -9.4,-3.894 -9.737,-2.954 -9.979,-1.985 -10.126,-0.997 -10.175,0 -10.126,0.997 -9.979,1.985 -9.737,2.954 -9.4,3.894 -8.973,4.796 -8.46,5.653 -7.865,6.455 -7.195,7.195 -6.455,7.865 -5.653,8.46 -4.796,8.973 -3.894,9.4 -2.954,9.737 -1.985,9.979 -0.997,10.126 0,10.175 0.997,10.126 1.985,9.979 2.954,9.737 3.894,9.4 4.796,8.973 5.653,8.46 6.455,7.865 7.195,7.195 7.865,6.455 8.46,5.653 8.973,4.796 9.4,3.894 9.737,2.954 9.979,1.985 10.126,0.997 10.175,0
  Top Layer region: 8.598,0 8.556,0.843 8.433,1.677 8.228,2.496 7.943,3.29 7.583,4.053 7.149,4.777 6.646,5.454 6.08,6.08 5.454,6.646 4.777,7.149 4.053,7.583 3.29,7.943 2.496,8.228 1.677,8.433 0.843,8.556 0,8.598 -0.843,8.556 -1.677,8.433 -2.496,8.228 -3.29,7.943 -4.053,7.583 -4.777,7.149 -5.454,6.646 -6.08,6.08 -6.646,5.454 -7.149,4.777 -7.583,4.053 -7.943,3.29 -8.228,2.496 -8.433,1.677 -8.556,0.843 -8.598,0 -8.556,-0.843 -8.433,-1.677 -8.228,-2.496 -7.943,-3.29 -7.583,-4.053 -7.149,-4.777 -6.646,-5.454 -6.08,-6.08 -5.454,-6.646 -4.777,-7.149 -4.053,-7.583 -3.29,-7.943 -2.496,-8.228 -1.677,-8.433 -0.843,-8.556 0,-8.598 0.843,-8.556 1.677,-8.433 2.496,-8.228 3.29,-7.943 4.053,-7.583 4.777,-7.149 5.454,-6.646 6.08,-6.08 6.646,-5.454 7.149,-4.777 7.583,-4.053 7.943,-3.29 8.228,-2.496 8.433,-1.677 8.556,-0.843 8.598,0 8.297,0 8.258,-0.813 8.138,-1.619 7.94,-2.409 7.666,-3.175 7.318,-3.911 6.899,-4.61 6.414,-5.264 5.867,-5.867 5.264,-6.414 4.61,-6.899 3.911,-7.318 3.175,-7.666 2.409,-7.94 1.619,-8.138 0.813,-8.258 0,-8.297 -0.813,-8.258 -1.619,-8.138 -2.409,-7.94 -3.175,-7.666 -3.911,-7.318 -4.61,-6.899 -5.264,-6.414 -5.867,-5.867 -6.414,-5.264 -6.899,-4.61 -7.318,-3.911 -7.666,-3.175 -7.94,-2.409 -8.138,-1.619 -8.258,-0.813 -8.297,0 -8.258,0.813 -8.138,1.619 -7.94,2.409 -7.666,3.175 -7.318,3.911 -6.899,4.61 -6.414,5.264 -5.867,5.867 -5.264,6.414 -4.61,6.899 -3.911,7.318 -3.175,7.666 -2.409,7.94 -1.619,8.138 -0.813,8.258 0,8.297 0.813,8.258 1.619,8.138 2.409,7.94 3.175,7.666 3.911,7.318 4.61,6.899 5.264,6.414 5.867,5.867 6.414,5.264 6.899,4.61 7.318,3.911 7.666,3.175 7.94,2.409 8.138,1.619 8.258,0.813 8.297,0
  Top Layer region: 6.723,0 6.681,0.753 6.555,1.496 6.346,2.22 6.057,2.917 5.693,3.577 5.256,4.192 4.754,4.754 4.192,5.256 3.577,5.693 2.917,6.057 2.22,6.346 1.496,6.555 0.753,6.681 0,6.723 -0.753,6.681 -1.496,6.555 -2.22,6.346 -2.917,6.057 -3.577,5.693 -4.192,5.256 -4.754,4.754 -5.256,4.192 -5.693,3.577 -6.057,2.917 -6.346,2.22 -6.555,1.496 -6.681,0.753 -6.723,0 -6.681,-0.753 -6.555,-1.496 -6.346,-2.22 -6.057,-2.917 -5.693,-3.577 -5.256,-4.192 -4.754,-4.754 -4.192,-5.256 -3.577,-5.693 -2.917,-6.057 -2.22,-6.346 -1.496,-6.555 -0.753,-6.681 0,-6.723 0.753,-6.681 1.496,-6.555 2.22,-6.346 2.917,-6.057 3.577,-5.693 4.192,-5.256 4.754,-4.754 5.256,-4.192 5.693,-3.577 6.057,-2.917 6.346,-2.22 6.555,-1.496 6.681,-0.753 6.723,0 6.423,0 6.382,-0.719 6.262,-1.429 6.062,-2.121 5.787,-2.787 5.438,-3.417 5.021,-4.004 4.541,-4.541 4.004,-5.021 3.417,-5.438 2.787,-5.787 2.121,-6.062 1.429,-6.262 0.719,-6.382 0,-6.423 -0.719,-6.382 -1.429,-6.262 -2.121,-6.062 -2.787,-5.787 -3.417,-5.438 -4.004,-5.021 -4.541,-4.541 -5.021,-4.004 -5.438,-3.417 -5.787,-2.787 -6.062,-2.121 -6.262,-1.429 -6.382,-0.719 -6.423,0 -6.382,0.719 -6.262,1.429 -6.062,2.121 -5.787,2.787 -5.438,3.417 -5.021,4.004 -4.541,4.541 -4.004,5.021 -3.417,5.438 -2.787,5.787 -2.121,6.062 -1.429,6.262 -0.719,6.382 0,6.423 0.719,6.382 1.429,6.262 2.121,6.062 2.787,5.787 3.417,5.438 4.004,5.021 4.541,4.541 5.021,4.004 5.438,3.417 5.787,2.787 6.062,2.121 6.262,1.429 6.382,0.719 6.423,0
  Top Layer region: 4.848,0 4.806,0.633 4.683,1.255 4.479,1.855 4.198,2.424 3.846,2.951 3.428,3.428 2.951,3.846 2.424,4.198 1.855,4.479 1.255,4.683 0.633,4.806 0,4.848 -0.633,4.806 -1.255,4.683 -1.855,4.479 -2.424,4.198 -2.951,3.846 -3.428,3.428 -3.846,2.951 -4.198,2.424 -4.479,1.855 -4.683,1.255 -4.806,0.633 -4.848,0 -4.806,-0.633 -4.683,-1.255 -4.479,-1.855 -4.198,-2.424 -3.846,-2.951 -3.428,-3.428 -2.951,-3.846 -2.424,-4.198 -1.855,-4.479 -1.255,-4.683 -0.633,-4.806 0,-4.848 0.633,-4.806 1.255,-4.683 1.855,-4.479 2.424,-4.198 2.951,-3.846 3.428,-3.428 3.846,-2.951 4.198,-2.424 4.479,-1.855 4.683,-1.255 4.806,-0.633 4.848,0 4.547,0 4.508,-0.594 4.392,-1.177 4.201,-1.74 3.938,-2.274 3.608,-2.768 3.215,-3.215 2.768,-3.608 2.274,-3.938 1.74,-4.201 1.177,-4.392 0.594,-4.508 0,-4.547 -0.594,-4.508 -1.177,-4.392 -1.74,-4.201 -2.274,-3.938 -2.768,-3.608 -3.215,-3.215 -3.608,-2.768 -3.938,-2.274 -4.201,-1.74 -4.392,-1.177 -4.508,-0.594 -4.547,0 -4.508,0.594 -4.392,1.177 -4.201,1.74 -3.938,2.274 -3.608,2.768 -3.215,3.215 -2.768,3.608 -2.274,3.938 -1.74,4.201 -1.177,4.392 -0.594,4.508 0,4.547 0.594,4.508 1.177,4.392 1.74,4.201 2.274,3.938 2.768,3.608 3.215,3.215 3.608,2.768 3.938,2.274 4.201,1.74 4.392,1.177 4.508,0.594 4.547,0
  Top Layer region: 4.687,0.15 15,0.15 15,-0.15 4.687,-0.15
  Bottom Layer region: 2.779,14.74 2.779,14.741 2.348,14.827 1.178,14.965 0,15.012 -1.178,14.965 -2.348,14.827 -2.779,14.741 -0.584,3.704 -0.586,3.715 0,3.762 0.586,3.715
  Bottom Layer region: -3.073,14.682 -3.073,14.683 -3.504,14.597 -4.639,14.277 -5.745,13.869 -6.815,13.375 -7.844,12.799 -8.209,12.555 -1.957,3.199 -1.957,3.199 -1.708,3.352 -1.162,3.577 -0.878,3.646
  Bottom Layer region: -8.458,12.388 -8.458,12.389 -8.824,12.145 -9.749,11.415 -10.615,10.615 -11.415,9.749 -12.145,8.824 -12.389,8.458 -3.032,2.206 -3.041,2.213 -2.66,2.66 -2.213,3.041
  Bottom Layer region: -12.555,8.208 -12.555,8.209 -12.799,7.844 -13.375,6.815 -13.869,5.745 -14.277,4.639 -14.597,3.504 -14.683,3.073 -3.646,0.878 -3.577,1.162 -3.352,1.708 -3.199,1.957
  Bottom Layer region: -14.74,2.779 -14.741,2.779 -14.827,2.348 -14.965,1.178 -15.012,0 -14.965,-1.178 -14.827,-2.348 -14.741,-2.779 -3.704,-0.584 -3.715,-0.586 -3.762,0 -3.715,0.586
  Bottom Layer region: -14.682,-3.073 -14.683,-3.073 -14.597,-3.504 -14.277,-4.639 -13.869,-5.745 -13.375,-6.815 -12.799,-7.844 -12.555,-8.209 -3.199,-1.957 -3.199,-1.957 -3.352,-1.708 -3.577,-1.162 -3.646,-0.878
  Bottom Layer region: -12.388,-8.458 -12.389,-8.458 -12.145,-8.824 -11.415,-9.749 -10.615,-10.615 -9.749,-11.415 -8.824,-12.145 -8.458,-12.389 -2.206,-3.032 -2.213,-3.041 -2.66,-2.66 -3.041,-2.213
  Bottom Layer region: -8.208,-12.555 -8.209,-12.555 -7.844,-12.799 -6.815,-13.375 -5.745,-13.869 -4.639,-14.277 -3.504,-14.597 -3.073,-14.683 -0.878,-3.646 -1.162,-3.577 -1.708,-3.352 -1.957,-3.199
  Bottom Layer region: -2.779,-14.74 -2.779,-14.741 -2.348,-14.827 -1.178,-14.965 0,-15.012 1.178,-14.965 2.348,-14.827 2.779,-14.741 0.584,-3.704 0.586,-3.715 0,-3.762 -0.586,-3.715
  Bottom Layer region: 3.073,-14.682 3.073,-14.683 3.504,-14.597 4.639,-14.277 5.745,-13.869 6.815,-13.375 7.844,-12.799 8.209,-12.555 1.957,-3.199 1.957,-3.199 1.708,-3.352 1.162,-3.577 0.878,-3.646
  Bottom Layer region: 8.458,-12.388 8.458,-12.389 8.824,-12.145 9.749,-11.415 10.615,-10.615 11.415,-9.749 12.145,-8.824 12.389,-8.458 3.032,-2.206 3.041,-2.213 2.66,-2.66 2.213,-3.041
  Bottom Layer region: 12.555,-8.208 12.555,-8.209 12.799,-7.844 13.375,-6.815 13.869,-5.745 14.277,-4.639 14.597,-3.504 14.683,-3.073 3.646,-0.878 3.577,-1.162 3.352,-1.708 3.199,-1.957
  Bottom Layer region: 14.74,-2.779 14.741,-2.779 14.827,-2.348 14.965,-1.178 15.012,0 14.965,1.178 14.827,2.348 14.741,2.779 3.704,0.584 3.715,0.586 3.762,0 3.715,-0.586
  Bottom Layer region: 14.682,3.073 14.683,3.073 14.597,3.504 14.277,4.639 13.869,5.745 13.375,6.815 12.799,7.844 12.555,8.209 3.199,1.957 3.352,1.708 3.577,1.162 3.646,0.878
  Bottom Layer region: 12.388,8.458 12.389,8.458 12.145,8.824 11.415,9.749 10.615,10.615 9.749,11.415 8.824,12.145 8.458,12.389 2.206,3.032 2.213,3.041 2.66,2.66 3.041,2.213
  Bottom Layer region: 8.208,12.555 8.209,12.555 7.844,12.799 6.815,13.375 5.745,13.869 4.639,14.277 3.504,14.597 3.073,14.683 0.878,3.646 1.162,3.577 1.708,3.352 1.957,3.199
?#9 [mm]
  rect 0x0 all layers, no hole paste-0.05 mask+0.102: 1(-23,0) 1(23,0) 2(-7.667,0) 3(7.667,0)
  Top Layer region: -25,6 -21,6 -10.509,2 -21,-2 -10.509,-6 -25,-6
  Top Layer region: -20.158,6 -5.667,6 4.825,2 -5.667,-2 4.825,-6 -9.667,-6 -20.158,-2 -9.667,2
  Top Layer region: -4.825,6 9.667,6 20.158,2 9.667,-2 20.158,-6 5.667,-6 -4.825,-2 5.667,2
  Top Layer region: 10.509,6 25,6 25,-6 21,-6 10.509,-2 21,2